# Altium PCB Amber_Main_Board.PcbDoc (part 2 of 2)
Units mm, origin at the board's own origin, x right, y up, seen from the top; angles counter-clockwise.
Board outline 90 x 23 mm, 4 copper layers (Top Layer, Power, Ground, Bottom Layer), stack 1.142 mm thick; 223 components, 97 nets, 585 pads, 378 vias.
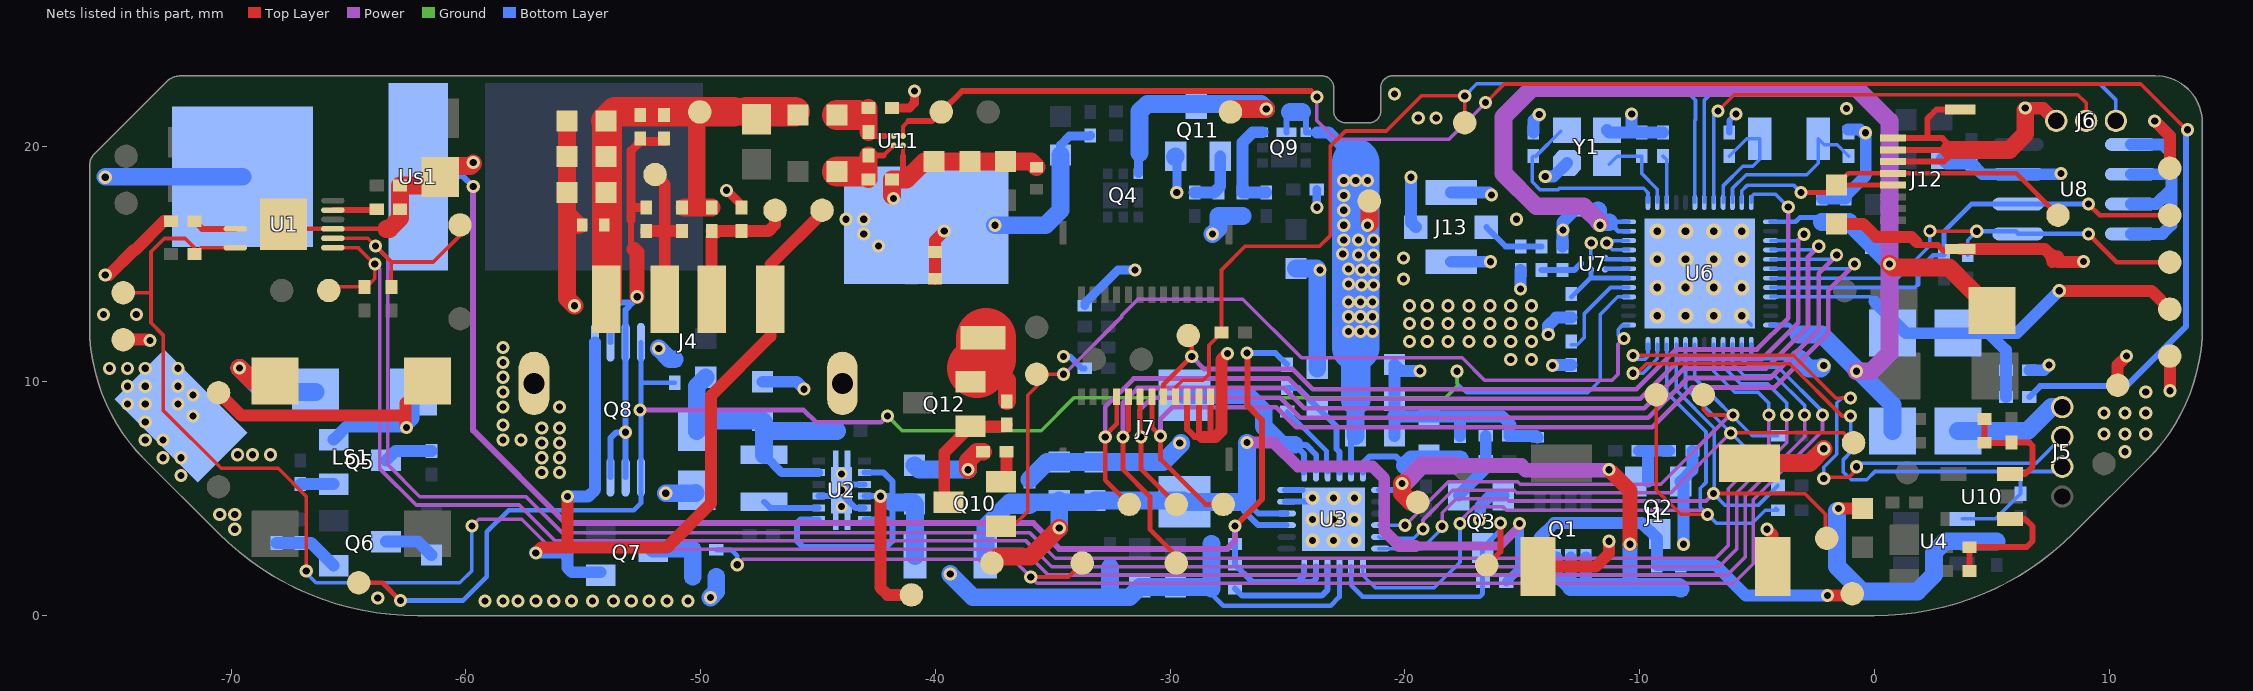
[diagram p4: the nets of this part, all layers, seen from the top]

## Via types
v1: diameter 0.559, hole 0.305, Top Layer to Bottom Layer, tented both sides, 350 vias
v2: diameter 0.66, hole 0.33, Top Layer to Bottom Layer, tented both sides, 16 vias
v3: diameter 0.6, hole 0.3, Top Layer to Bottom Layer, tented both sides, 9 vias
v4: diameter 0.5, hole 0.3, Top Layer to Bottom Layer, 3 vias

## Nets (pads, with @x,y where several pads share a name; then routed paths per layer and width w, separated by ;. In a path a pad name is that pad's centre, name@x,y a point inside that pad or via, vN(x,y) a via of type N, cw(c..) or ccw(c..) an arc to the next point about the centre after c; other vN are vias at no path point) (continued)
GND: C1.2 C2.2 C3.2 C4.2 C5.2 C6.2 C7.2 C8.2 C9.2 C10.2 C11.2 C13.2 C14.2 C15.2 C16.2 C19.2 C20.2 C21.2 C22.2 C23.2 C24.2 C29.1 C31.1 C32.1 C33.2 C34.1 C35.1 C36.1 C37.1 C38.1 C39.2 C40.2 C41.1 C42.1 C43.1 C44.2 C45.2 C46.2 C47.2 C48.1 C54.2 C55.2 C57.2 C58.2 C59.2 C60.2 C61.2 C62.2 C63.2 C65.2 C66.2 D2.1 D4.1 D12.2 D14.1 D17.2 J1.2 J1.3 J1.4 J4.5 J4.6 J5.4 J6.3 J7.10 J7.11 J7.12 J12.6 J12.7 J12.8 J12.9 J12.10 J13.2 J13.3 J13.4 J15.1 J16.2 L3.2 LS1.2 Q2.1 Q3.1 Q8.2 Q8.3 Q8.6 Q8.7 Q11.1 R4.1 R10.2 R11.2 R16.1 R22.1 R25.1 R26.2 R28.2 R39.2 R60.1 R64.1 R68.1 R69.1 R71.2 R73.2 RTH1.2 TP17.1 TP20.1 TP21.1 TP22.1 U1.3 U1.13 U2.3 U2.9 U2.11 U2.13 U2.14 U2.15 U2.16 U2.17 U3.9 U3.17 U3.18 U3.25 U4.2 U6.13 U6.33 U6.34 U6.49 U7.4 U8.1 U8.2 U8.3 U8.4 U8.7 U11.B1 Us1.3 Y1.2 Y1.4 | length 267.6
  Top Layer w0.178: -41.383,19.577 U11.B1@-41.383,20.038
  Top Layer w0.203: U1.13@-67.77,16.682 -67.57,16.482 U1.3@-65.67,16.482 -63.395,16.482
  Top Layer w0.254: -52.96,15.697 -52.96,16.862 ; -41.383,19.577 -41.383,18.74 -41.23,18.587 ; J7.10@-29.28,9.325 -29.28,7.944 -28.956,7.62 -28.639,7.62 ; -28.78,7.698 J7.11@-28.78,9.325 ; -28.28,7.661 J7.12@-28.28,9.325 ; J12.6@0.795,19.348 2.965,19.348 3.175,19.558 3.175,19.848 3.175,20.066 2.893,20.348 2.253,20.348 ; J12.7@0.795,19.848 3.139,19.848 ; J12.8@0.795,20.348 2.253,20.348 ; 1.802,15.911 1.929,15.784 2.706,15.784 2.925,15.565 3.602,15.565 J12.9@3.665,15.628 ; J12.10@3.665,21.568 2.645,21.568 2.253,21.176 2.253,20.348
  Top Layer w0.381: -52.96,16.862 -52.96,19.819 -52.578,20.201 C8.2@-51.562,20.201 ; -52.952,17.391 R10.2@-52.324,17.391 ; v1(-48.895,18.123) -48.26,17.488 R11.2@-48.26,17.391 R11.2@-48.252,17.399 ; C48.1@-41.845,21.635 -41.103,21.635 -40.894,21.844 v1(-40.894,22.352)
  Top Layer w0.508: v1@-75.195,14.523 -74.138,15.579 -74.095,15.579 -72.866,16.809 R4.1@-72.563,16.809 ; TP22.1@-74.603,11.761 v1@-73.492,11.761 ; U1.13@-67.77,16.682 U1.13@-67.618,16.834 ; C4.2@-40.013,14.351 C59.2@-40.013,15.494 -40.013,15.994 v1(-39.624,16.383) ; -28.639,7.62 -28.067,7.62 -27.813,7.874 -27.813,10.922 v1(-27.559,11.176) ; J1.4@-14.33,2.096 -11.874,2.096 -11.303,2.667 v1(-11.303,3.175) ; v1(-4.572,3.683) -4.33,3.441 J1.3@-4.33,2.096 ; C54.2@-1.608,16.695 -0.481,16.695 0.073,16.142 1.571,16.142 1.802,15.911 ; v1(-1.524,4.572) L3.2@-0.508,4.572 ; J12.9@3.665,15.628 7.255,15.628 7.82,15.063 v1@8.9,15.063 ; v1@6.423,21.603 7.167,21.603 J6.3@7.39,21.38 ; v1(6.423,21.635) 7.194,21.635 J6.3@7.747,21.082 ; 7.574,15.063 ccw(c6.98,15.063) 7.4,15.483 ccw(c7.82,15.903) 7.82,15.309 ; TP17.1@10.36,9.824 10.36,10.681 v1(10.741,11.062) ; v1(11.938,21.082) 12.584,20.436 TP20.1@12.584,19.063 ; v1(12.584,9.586) TP21.1@12.584,11.063
  Top Layer w0.635: -52.833,15.614 -52.705,15.486 v1(-52.705,13.589)
  Top Layer w0.762: v1(-69.65,10.554) -69.09,9.994 LS1.2@-68.136,9.994 ; -63.394,16.483 -63.258,16.483 -62.8,16.941 C1.2@-62.8,17.317 C3.2@-62.8,18.333 C66.2@-61.437,18.333 ; C66.2@-61.087,18.683 -60.618,19.152 -59.811,19.152 v1@-59.69,19.273 ; C9.2@-55.689,21.082 C7.2@-55.689,19.558 C6.2@-55.689,18.034 -55.689,17.118 ; v1(-55.372,13.208) -55.689,13.525 -55.689,17.118 ; D4.1@-55.208,16.637 -55.689,17.118 ; v1@-41.845,17.91 C55.2@-41.845,18.587 -41.23,18.587 -40.468,19.349 C58.2@-40.059,19.349 C5.2@-38.535,19.349 C2.2@-37.011,19.349 -35.925,19.349 D14.1@-35.687,19.111 ; v1(-38.608,6.223) -38.608,6.604 -38.227,6.985 R69.1@-37.965,6.985 ; J1.2@-5.33,6.503 -2.768,6.503 v1(-2.159,7.112) ; 3.175,19.848 5.751,19.848 6.423,20.52 v1@6.423,21.533
  Bottom Layer w0.152: U7.4@-12.076,15.249 -12.076,15.864 v1(-12.065,15.875) ; U6.33@-10.472,15.583 -11.152,15.583 -11.357,15.788 -11.357,15.983 U6.34@-10.472,15.983 ; v2(-5.647,12.783) U6.49@-5.247,12.383
  Bottom Layer w0.203: R22.1@-28.248,0.934 -27.74,0.426 -23.168,0.426 -22.791,0.803 U3.9@-22.791,2.109 ; C32.1@-6.212,20.579 C32.1@-6.212,20.777 ; U6.13@-5.247,11.558 -5.247,11.08 -5.134,10.967 C43.1@-3.237,10.967
  Bottom Layer w0.254: Q8.7@-53.846,5.901 -53.846,7.562 -53.592,7.816 v1(-53.196,7.816) ; Q8.2@-53.846,11.651 -53.846,13.023 -53.521,13.348 -52.886,13.348 -53.196,13.038 Q8.3@-53.196,11.651 v1(-53.196,7.816) ; Q8.6@-53.196,5.901 v1(-53.196,7.816) ; U2.3@-44.971,5.097 U2.13@-44.246,5.097 ; v4(-43.996,5.347) -43.996,5.18 -43.413,4.597 U2.11@-43.021,4.597 ; U2.13@-43.746,5.597 U2.9@-43.021,5.597 ; v1(-34.544,11.049) -34.275,11.049 -33.767,10.541 R71.2@-33.639,10.541 ; U3.17@-25.114,4.859 U3.25@-23.864,4.859 ; U3.18@-25.114,5.359 U3.25@-24.364,5.359 ; R25.1@-15.556,7.665 R25.1@-15.556,7.8 ; R16.1@-7.755,7.03 R16.1@-7.712,7.03 ; C32.1@-6.18,20.579 -6.18,21.097 v1(-5.896,21.381)
  Bottom Layer w0.381: C61.2@-34.671,19.621 -34.671,20.048 -34.29,20.429 -33.427,20.429 C60.2@-33.401,20.455 ; R73.2@-33.639,13.208 -33.639,13.315 -32.222,14.732 v1(-31.496,14.732) ; Q11.1@-29.794,19.549 -29.718,19.472 v1(-29.718,18.034) ; v1@-23.757,17.407 C63.2@-23.757,18.161
  Bottom Layer w0.508: v1(-75.365,18.682) v1@-75.347,18.7 ; C10.2@-47.371,9.97 -45.91,9.97 v1(-45.593,9.652) ; -20.511,8.49 -20.447,8.49 ; C20.2@-20.447,7.654 -20.447,8.49 ; v1(-19.739,18.682) -19.739,16.76 J13.3@-19.534,16.555 ; v1(-19.358,10.427) -20.172,10.427 C47.2@-20.447,10.702 C46.2@-20.447,9.178 -20.447,8.49 ; J13.4@-18.034,15.08 v1(-16.356,15.08) ; J13.2@-18.034,18.03 -16.42,18.03 v1(-16.31,17.92) ; C19.2@-17.653,7.657 -17.653,8.49 ; v1(-16.818,4.077) -16.793,4.102 -16.793,4.67 -16.338,5.125 Q3.1@-15.802,5.125 ; R25.1@-15.556,7.665 -14.417,7.665 D2.1@-14.351,7.599 ; R25.1@-15.556,7.8 -15.556,8.066 -15.494,8.128 -15.856,8.49 -17.653,8.49 ; v1(-15.07,13.918) C40.2@-15.07,14.735 ; C29.1@-14.532,20.579 -14.532,21.095 v1(-14.278,21.349) ; v1(-14.024,18.714) -13.666,18.714 Y1.2@-13.096,19.284 ; v1(-13.897,11.983) -13.897,12.364 -13.558,12.703 C41.1@-12.911,12.703 ; v1@-13.708,10.676 C42.1@-12.911,10.676 ; C39.2@-13.292,15.735 -13.292,16.751 C38.1@-12.776,17.267 ; Y1.4@-11.396,20.684 -11.291,20.579 -10.341,20.579 ; v1(-10.341,21.381) -10.341,20.579 ; C35.1@-9.006,20.579 C31.1@-9.913,20.579 -10.341,20.579 ; Q2.1@-8.255,5.715 -7.755,6.215 R16.1@-7.755,7.03 ; v1(-8.128,3.048) Q2.1@-8.128,5.588 ; C36.1@-2.243,17.767 C37.1@-1.227,17.767 -1.227,17.89 -0.37,18.747 -0.37,20.46 -0.616,20.706 C34.1@-1.132,20.706 ; C44.2@2.87,19.476 3.079,19.266 C45.2@4.137,19.266 4.594,18.809 U8.7@6.12,18.809 v1@7.947,18.809 ; C33.2@6.596,10.459 7.217,10.459 v1(7.439,10.681) ; U8.4@10.92,16.269 12.265,16.269 12.646,16.65 12.646,18.174 ; U8.3@10.92,17.539 12.011,17.539 12.646,18.174 ; U8.2@10.92,18.809 12.392,18.809 12.646,19.063 ; U8.1@10.92,20.079 12.265,20.079 12.598,19.745 ; v1(11.938,21.082) 12.598,20.422 12.598,19.745 ; -20.447,8.49 C14.2@-18.977,8.49 -17.653,8.49 ; 12.598,19.745 12.598,19.11 12.646,19.063 ; 12.646,18.174 12.646,19.063
  Bottom Layer w0.762: v1@-75.347,18.7 Us1.3@-69.515,18.7 ; v1(-69.65,10.554) -68.634,9.538 D12.2@-66.401,9.538 ; v1(-51.787,11.392) -51.322,10.927 R39.2@-51.108,10.927 ; v1(-51.489,5.22) -50.233,5.22 C65.2@-50.219,5.234 ; v1(-49.584,0.775) -49.338,1.021 R64.1@-49.338,1.664 ; C11.2@-40.894,6.413 -40.703,6.223 v1(-38.608,6.223) ; v1(-39.37,1.778) -39.37,1.764 -38.394,0.787 -32.766,0.787 ; v1(-37.465,16.637) -35.306,16.637 -34.671,17.272 C61.2@-34.671,19.621 ; C16.2@-35.995,5.801 -35.243,6.553 C13.2@-34.725,6.553 C15.2@-33.201,6.553 -30.297,6.553 -29.543,7.307 v1@-29.543,7.366 ; C24.2@-32.566,2.053 -32.566,0.987 -32.766,0.787 ; Q11.1@-29.794,19.549 Q11.1@-29.772,19.571 ; R22.1@-28.304,1.219 C23.2@-29.772,1.219 C22.2@-31.296,1.219 -31.728,0.787 -32.766,0.787 ; R22.1@-28.24,1.156 RTH1.2@-28.24,3.061 ; v1(-28.194,16.256) -27.94,16.51 R60.1@-27.94,17.026 R68.1@-26.924,17.026 ; C62.2@-24.638,14.795 -23.762,14.795 -23.736,14.769 C21.2@-23.736,10.538 ; C43.1@-3.237,10.967 C43.1@-3.221,10.967 ; C43.1@-3.229,10.975 C43.1@-3.221,10.967 ; v1@-2.222,10.604 -2.286,10.541 -2.795,10.541 C43.1@-3.221,10.967 ; v1@-1.594,4.47 -1.594,2.102 -0.528,1.036 1.827,1.036 2.54,1.749 2.54,2.701 3.014,3.175 U4.2@3.74,3.175 3.748,3.167 R28.2@5.207,3.167 ; D17.2@3.556,7.866 6.522,7.866 7.546,8.89 J5.4@8.001,8.89
  other v1: -59.182,0.635 -58.42,0.635 -57.785,0.635 -57.023,0.635 -56.261,0.635 -55.499,0.635 -54.61,0.635 -53.721,0.635 -52.959,0.635 -52.197,0.635 -51.435,0.635 -50.546,0.635 -63.754,0.762 -69.85,3.683 -70.485,4.318 -69.85,4.318 -72.136,5.969 -56.769,6.096 -56.007,6.096 -72.898,6.731 -72.136,6.731 -56.769,6.731 -56.007,6.731 -69.723,6.858 -69.088,6.858 -68.326,6.858 10.668,6.985 -56.769,7.366 -56.007,7.366 -29.591,7.366 -73.66,7.493 -72.898,7.493 -58.42,7.493 -57.658,7.493 9.779,7.747 10.668,7.747 11.557,7.747 -56.769,8.001 -56.007,8.001 -58.42,8.128 -73.66,8.255 -71.628,8.509 9.779,8.636 10.668,8.636 11.557,8.636 -58.42,8.89 -56.007,8.89 -74.422,9.017 -73.66,9.017 -72.263,9.017 -71.628,9.398 -58.42,9.525 11.557,9.525 -74.422,9.779 -73.66,9.779 -72.263,9.779 -58.42,10.16 -75.184,10.541 -74.422,10.541 -73.66,10.541 -72.263,10.541 -13.716,10.668 -2.159,10.668 -58.42,10.795 -15.494,10.922 -14.605,10.922 -58.42,11.43 -19.812,11.684 -19.05,11.684 -18.161,11.684 -17.272,11.684 -16.383,11.684 -15.494,11.684 -14.605,11.684 -73.46,11.729 -19.812,12.446 -19.05,12.446 -18.161,12.446 -17.272,12.446 -16.383,12.446 -15.494,12.446 -14.605,12.446 -75.438,12.827 -74.041,12.827 -19.812,13.208 -19.05,13.208 -18.161,13.208 -17.272,13.208 -16.383,13.208 -15.494,13.208 -14.605,13.208 -20.066,14.351 -75.365,14.523 -23.622,14.732 8.9,15.095 -20.066,15.24 -42.418,15.748 -11.405,15.875 -43.053,16.256 -13.262,16.428 -43.815,16.891 -43.053,16.891 -15.24,16.891 -23.749,17.399 -41.783,17.78 7.947,18.841 -59.69,19.304 -0.381,20.574 -19.431,21.209 -18.669,21.209 -1.197,21.603 -20.447,22.225
  other v2: -9.247,12.783 -8.047,12.783 -6.847,12.783 -9.247,13.983 -8.047,13.983 -6.847,13.983 -5.647,13.983 -9.247,15.183 -8.047,15.183 -6.847,15.183 -5.647,15.183 -9.247,16.383 -8.047,16.383 -6.847,16.383 -5.647,16.383
  other v3: -23.941,3.209 -23.041,3.209 -22.141,3.209 -23.941,4.109 -23.041,4.109 -22.141,4.109 -23.941,5.009 -23.041,5.009 -22.141,5.009
  other v4: -43.996,4.647 -43.996,6.047
GPOUT: R3.1 TP5.1 U1.12 U6.15 | length 100.5
  Top Layer w0.152: TP5.1@-74.603,13.761 -73.461,13.761 ; U1.12@-69.82,15.682 -71.293,15.682 R3.1@-71.563,15.412 -71.563,15.674 -71.961,16.072 -72.848,16.072 -73.416,15.504 -73.416,12.475 -72.901,11.96 -72.901,8.76 -70.421,6.279 -68.001,6.279 -66.802,5.08 v1(-66.802,1.905)
  Power w0.152: v1(-59.744,3.823) -59.458,4.109 -57.617,4.109 -56.34,2.832 -36.29,2.832 -35.193,1.736 -6.265,1.736 -5.512,2.489 -5.512,5.091 -2.975,7.628 v1(-2.975,8.554)
  Bottom Layer w0.152: v1(-66.802,1.905) -66.802,1.821 -66.384,1.404 -60.258,1.404 -59.744,1.918 v1(-59.744,3.823) ; U6.15@-6.047,11.558 -6.047,10.732 -5.546,10.23 -4.245,10.23 -2.975,8.96 v1(-2.975,8.554)
HALL_OUT: C54.1 J12.4 J12.5 TP70.1 U6.47 | length 17.7
  Top Layer w0.203: v1(-3.132,18.029) -1.926,18.029 C54.1@-1.608,18.346 C54.1@-1.606,18.348 ; J12.4@0.795,18.348 C54.1@-1.606,18.348 ; TP70.1@7.82,17.063 6.035,18.848 J12.5@0.795,18.848 -1.106,18.848 C54.1@-1.606,18.348
  Bottom Layer w0.152: U6.47@-5.647,17.608 -5.647,18.104 -5.405,18.346 -3.449,18.346 v1(-3.132,18.029)
I2C_A_SCL_T_E: R46.1 TP49.1 U6.8 U8.6 | length 19.6
  Top Layer w0.203: v1(9.112,17.539) 9.588,17.063 TP49.1@12.584,17.063
  Bottom Layer w0.152: U6.8@-4.422,13.983 1.724,13.983 1.851,14.11
  Bottom Layer w0.203: 1.851,14.11 1.851,14.714 2.499,15.362 R46.1@2.964,15.362 2.964,16.378 4.125,17.539 U8.6@6.12,17.539 v1(9.112,17.539)
I2C_A_SDA_T_E: R47.1 TP50.1 U6.7 U8.5 | length 20.1
  Top Layer w0.152: v1@2.202,16.378 v1(4.361,16.378)
  Top Layer w0.203: v1(9.112,16.269) 10.318,15.063 TP50.1@12.584,15.063
  Bottom Layer w0.152: U6.7@-4.422,14.383 0.981,14.383 2.359,15.761 v1(2.359,16.396) ; R47.1@3.98,15.362 3.98,15.997 v1@4.234,16.251
  Bottom Layer w0.203: v1@4.234,16.251 v1(4.361,16.378) 6.011,16.378 U8.5@6.12,16.269 v1(9.112,16.269)
I_2.06V: J4.2 R8.2 R10.1 TP18.1 | length 7.1
  Top Layer w0.508: R10.1@-52.324,16.391 -51.53,16.391 ; TP18.1@-51.943,18.796 -51.53,18.383 -51.53,16.391 ; J4.2@-51.562,13.509 J4.2@-51.53,13.477 -51.53,16.391 ; R8.2@-50.8,16.391 -51.53,16.391
I_2.76V: J4.3 R9.2 R11.1 TP19.1 | length 6.4
  Top Layer w0.508: J4.3@-49.53,13.477 -49.53,16.137 -49.276,16.391 ; R9.2@-49.53,16.391 -49.276,16.391 ; TP19.1@-46.831,17.272 -46.831,16.669 -47.109,16.391 -48.387,16.391 -49.276,16.391
IIC_A_M_BAT_SCL: R18.2 TP29.1 U3.5 U6.20 | length 31.2
  Top Layer w0.152: v1(-6.122,7.792) -1.315,7.792 TP29.1@-0.889,7.366 TP29.1@-1.016,7.239
  Power w0.152: v1(-19.231,3.696) -19.231,4.072 -18.276,5.027 ; -19.231,4.077 -17.961,5.347 -15.342,5.347 -15.24,5.245 -8.668,5.245 v1(-6.122,7.792)
  Bottom Layer w0.152: U3.5@-21.114,3.359 -21.051,3.296 -19.631,3.296 v1(-19.231,3.696) ; U6.20@-8.047,11.558 -8.047,9.717 v1(-6.122,7.792) -4.936,6.606 R18.2@-4.11,6.606
IIC_A_M_BAT_SDA: R19.2 TP27.1 U3.6 U6.21 | length 32.2
  Top Layer w0.152: v1(-6.858,5.207) -2.975,5.207 -2.086,4.318 -2.086,3.356 TP27.1@-2.032,3.302
  Power w0.152: v1(-18.415,3.81) -18.415,4.385 -17.809,4.991 -15.677,4.991 -15.576,4.89 -7.175,4.89 v1(-6.858,5.207)
  Bottom Layer w0.152: U3.6@-21.114,2.859 U3.6@-21.041,2.859 -19.278,2.859 -18.415,3.722 v1(-18.415,3.81) ; U6.21@-8.447,11.558 -8.447,9.614 -6.82,7.987 -6.82,5.245 v1(-6.858,5.207) -6.35,4.699 -4.959,4.699 R19.2@-4.11,5.548
IIC_A_SCL_BAT: R2.1 TP8.1 U1.2 U6.17 | length 87.2
  Top Layer w0.152: U1.2@-65.67,16.082 -64.186,16.082 v1(-63.853,15.748) -63.173,15.068 ; R2.1@-63.173,14.007 -63.173,15.068 ; TP8.1@-60.252,16.65 -60.252,16.202 -61.386,15.068 -63.173,15.068
  Power w0.152: v1(-63.853,15.748) -63.322,15.217 -63.322,6.426 -61.97,5.074 -57.439,5.074 -55.909,3.543 -35.995,3.543 -34.899,2.447 -6.768,2.447 -6.223,2.992 -6.223,5.411 -4.499,7.135 v1(-4.499,8.554)
  Bottom Layer w0.152: U6.17@-6.847,11.558 -6.847,10.412 -5.954,9.519 -4.956,9.519 -4.499,9.062 v1(-4.499,8.554)
IIC_A_SDA_BAT: R1.1 TP4.1 U1.1 U6.16 | length 85.6
  Top Layer w0.152: TP4.1@-65.84,13.856 -65.689,14.007 R1.1@-64.316,14.007 -64.225,14.007 -63.881,14.351 -63.881,14.958 v1@-63.909,14.986 ; U1.1@-65.67,15.682 -64.577,15.682 ; U1.1@-65.278,15.672 -64.596,15.672 v1@-63.909,14.986 ; v1(-63.881,14.986) v1@-63.909,14.986
  Power w0.152: v1(-63.881,14.986) -63.678,14.783 -63.678,6.274 -62.122,4.718 -57.724,4.718 -56.193,3.188 -36.142,3.188 -35.046,2.091 -6.621,2.091 -5.867,2.845 -5.867,5.238 -3.737,7.369 v1(-3.737,8.554)
  Bottom Layer w0.152: U6.16@-6.447,11.558 -6.447,10.629 -5.693,9.875 -4.55,9.875 -3.737,9.062 v1(-3.737,8.554)
INT_CHG: R21.2 TP30.1 U3.7 U6.22 | length 36.2
  Top Layer w0.152: TP30.1@-9.293,9.411 -9.293,5.356 -8.255,4.318 v1(-7.112,4.318)
  Power w0.152: v1(-17.653,3.937) -17.653,4.032 -17.05,4.636 -15.825,4.636 -15.685,4.496 -7.29,4.496 v1(-7.112,4.318)
  Bottom Layer w0.152: U3.7@-21.791,2.109 -21.791,1.725 -21.254,1.188 -18.751,1.188 -17.653,2.286 v1(-17.653,3.937) ; U6.22@-8.847,11.558 -8.847,9.511 -7.176,7.84 -7.176,5.68 -7.417,5.438 -7.417,4.623 v1(-7.112,4.318) -6.731,3.937 -5.207,3.937 -4.654,4.49 R21.2@-4.11,4.49 R21.2@-4.192,4.572
MB_ADC: C33.1 D11.2 D17.1 R61.2 TP55.1 U6.9 | length 21.7
  Top Layer w0.508: v1(7.874,13.843) 11.804,13.843 TP55.1@12.584,13.063
  Bottom Layer w0.152: U6.9@-4.422,13.583 -0.203,13.583 0,13.38
  Bottom Layer w0.508: 0,13.38 1.344,12.036 D17.1@3.556,12.036 4.876,12.036 ; R61.2@5.596,9.316 C33.1@5.596,10.459 5.596,11.316 4.876,12.036 ; v1(7.874,13.843) 6.067,12.036 4.876,12.036
MB_LOAD: C6.1 C7.1 C8.1 C9.1 C57.1 D4.2 J4.1 R8.1 R9.1 R48.2 R49.1 TP14.1 | length 20.3
  Top Layer w0.762: R8.1@-50.692,17.391 -50.165,17.391 ; TP14.1@-50.165,21.336 -50.165,17.391 ; R9.1@-49.53,17.391 -50.165,17.391
  Top Layer w1.27: C9.1@-54.038,21.082 -53.654,21.466 -48.583,21.466 ; J4.1@-53.989,13.518 -53.989,18.034 -53.989,19.558 C9.1@-53.989,21.032 ; R48.2@-48.075,21.466 R49.1@-45.977,21.466
MCU_2.8V: C36.2 C37.2 C38.2 C43.2 D11.1 D15.1 R40.2 U6.1 U6.12 U6.35 U6.36 | length 58.2
  Top Layer w0.762: v1(0.635,14.986) 0.787,14.834 3.171,14.834 D15.1@5.006,12.999
  Power w0.508: -14.704,22.352 -0.644,22.352
  Power w0.762: -14.704,22.352 -15.802,21.254 -15.802,18.841 -14.405,17.444 -12.389,17.444 v1@-11.684,16.739 ; v1(-0.762,10.414) -0.127,10.414 0.635,11.176 v1(0.635,14.986) 0.635,21.073 -0.644,22.352
  Bottom Layer w0.203: -11.303,16.764 -11.284,16.783 -11.049,16.783 ; U6.35@-10.472,16.383 -10.922,16.383 -11.049,16.51 -11.049,16.783 ; U6.36@-10.472,16.783 -11.049,16.783 ; U6.12@-4.422,12.383 -3.637,12.383 C43.2@-3.229,11.975 ; U6.1@-4.422,16.783 -3.362,16.783 -3.184,16.961 -2.438,16.961 C36.2@-2.243,16.767
  Bottom Layer w0.762: C38.2@-11.776,17.267 -11.776,16.831 -11.684,16.739 -11.659,16.764 -11.303,16.764 ; C43.2@-3.229,11.975 -2.228,11.975 0.762,8.985 D11.1@0.762,7.866 ; C36.2@-2.243,16.767 C37.2@-1.227,16.767 -1.089,16.767 R40.2@-0.192,15.87 ; R40.2@0.043,15.87 R40.2@-0.192,15.87 ; v1@0.635,15.043 R40.2@-0.192,15.87
  other v1: -11.684,16.637
NetC1_1: C1.1 U1.5 | length 1.8
  Top Layer w0.254: U1.5@-65.67,17.282 C1.1@-63.835,17.282
NetC10_1: C10.1 C65.1 L1.2 L2.1 R6.2 U2.5 | length 12.7
  Bottom Layer w0.381: L1.2@-47.298,6.855 -46.54,6.097 U2.5@-44.971,6.097
  Bottom Layer w0.762: L2.1@-49.784,10.16 -50.165,9.779 C65.1@-50.165,7.86 -49.706,8.319 C10.1@-47.371,8.319 -47.298,8.246 C10.1@-47.298,7.874 ; L1.2@-47.298,6.855 C10.1@-47.298,7.874 ; R6.2@-44.188,7.874 C10.1@-47.298,7.874
NetC14_1: C14.1 C18.2 C19.1 Q1.1 Q1.2 Q1.3 R12.2 TP24.1 U3.1 U3.24 | length 32.3
  Top Layer w0.635: v1@-11.222,6.142 -10.414,5.334 v1(-10.414,3.048)
  Top Layer w0.762: v1(-20.12,5.633) -20.12,5.22 -19.739,4.839 TP24.1@-19.453,4.839
  Power w0.635: -17.907,6.395 -15.043,6.395 -14.845,6.198 v1@-11.303,6.198
  Power w0.762: v1@-20.044,5.633 -19.282,6.395 -17.907,6.395
  Bottom Layer w0.254: U3.24@-21.791,6.109 -21.791,6.502 -21.517,6.776 -20.374,6.776 -19.993,6.395 -19.993,5.76 v1(-20.12,5.633) -20.394,5.359 U3.1@-21.114,5.359
  Bottom Layer w0.508: Q1.3@-13.545,2.491 -13.545,1.693 -13.003,1.151 ; -12.937,1.217 Q1.2@-12.937,2.491 ; -12.287,1.217 Q1.1@-12.287,2.491 ; C18.2@-9.271,1.151 R12.2@-8.255,1.151
  Bottom Layer w0.635: -10.414,1.217 v1(-10.414,3.048)
  Bottom Layer w0.762: -19.993,6.395 -19.731,6.657 C19.1@-17.653,6.657 ; -12.937,1.217 -12.287,1.217 -10.414,1.217 -8.321,1.217 R12.2@-8.255,1.151
  other v1: -11.303,6.223
NetC17_1: C17.1 L4.1 U3.19 U3.20 | length 9
  Bottom Layer w0.254: U3.19@-24.291,6.109 -24.291,6.883 -24.692,7.284 -24.211,7.284 -23.778,6.85 U3.20@-23.778,6.195
  Bottom Layer w0.762: L4.1@-29.391,9.4 -26.716,9.4 C17.1@-26.013,8.697 -26.013,8.065 -25.232,7.284 -24.692,7.284
NetC17_2: C17.2 U3.21 | length 3.3
  Bottom Layer w0.203: C17.2@-25.013,8.697 -23.346,7.029 -23.346,6.164 U3.21@-23.291,6.109
NetC18_1: C18.1 Q1.4 Q2.3 R12.1 TP23.1 | length 16.4
  Top Layer w0.508: v1(-2.003,0.858) -1.019,0.858 TP23.1@-0.943,0.934
  Bottom Layer w0.508: Q1.4@-14.279,2.491 -14.279,3.314 -13.643,3.95 -9.906,3.95 -9.271,3.315 C18.1@-9.271,2.151 R12.1@-8.255,2.151 -6.764,2.151 -5.471,0.858 v1(-2.003,0.858)
NetC29_2: C29.2 U6.37 Y1.3 | length 8.2
  Bottom Layer w0.152: C29.2@-14.532,19.579 -14.583,19.528 -14.583,18.482 -14.256,18.155 -13.471,18.155 -13.42,18.206 -9.833,18.206 -9.647,18.02 U6.37@-9.647,17.608 ; C29.2@-14.435,19.561 Y1.3@-13.362,20.634
NetC31_2: C31.2 U6.38 Y1.1 | length 3.8
  Bottom Layer w0.152: Y1.1@-11.299,19.234 -10.954,19.579 C31.2@-9.913,19.579 -9.913,18.841 -9.247,18.175 U6.38@-9.247,17.608
NetC32_2: C32.2 U6.45 Y2.2 | length 5.2
  Bottom Layer w0.152: U6.45@-6.447,17.608 -6.447,18.31 -5.61,19.146 -5.184,19.146 -4.89,19.441 Y2.2@-4.89,20.315 -5.444,20.315 C32.2@-6.18,19.579
NetC34_2: C34.2 U6.46 Y2.1 | length 7.3
  Bottom Layer w0.152: U6.46@-6.047,17.608 -6.047,18.207 -5.463,18.791 -2.878,18.791 -2.39,19.279 Y2.1@-2.39,20.315 -2.136,20.061 -1.582,20.061 C34.2@-1.1,19.579
NetC35_2: C35.2 U6.39 | length 2
  Bottom Layer w0.152: C35.2@-9.006,19.579 -8.847,19.42 U6.39@-8.847,17.608
NetC39_1: C39.1 R41.2 U7.5 | length 1.8
  Bottom Layer w0.254: R41.2@-14.181,14.735 C39.1@-13.292,14.735 -12.773,14.735 U7.5@-12.509,14.999
NetC40_1: C40.1 J13.1 R41.1 | length 2.7
  Bottom Layer w0.254: J13.1@-16.534,16.555 -15.714,15.735 C40.1@-15.07,15.735 R41.1@-14.181,15.735
NetC41_2: C41.2 U6.30 U7.3 | length 3.1
  Bottom Layer w0.203: C41.2@-12.911,13.576 -12.104,14.383 U6.30@-10.472,14.383 ; -12.076,14.411 U7.3@-12.076,14.749
NetC42_2: C42.2 U6.29 | length 4
  Bottom Layer w0.152: C42.2@-12.911,11.544 -12.665,11.544 -12.37,11.839 -12.37,12.855 -11.242,13.983 U6.29@-10.472,13.983
NetC48_2: C48.2 C49.1 R49.2 U11.A2 | length 3.1
  Top Layer w0.178: -42.164,20.447 -42.155,20.438 U11.A2@-41.783,20.438
  Top Layer w0.254: C49.1@-42.853,20.611 -42.68,20.438 -42.155,20.438
  Top Layer w0.762: C49.1@-42.853,20.611 C48.2@-42.853,21.627
  Top Layer w1.27: R49.2@-44.196,21.336 -43.274,21.336
NetC49_2: C49.2 C55.1 R50.2 U11.A1 | length 3.3
  Top Layer w0.178: -42.21,19.611 U11.A1@-41.825,19.996
  Top Layer w0.254: C49.2@-42.853,19.611 -42.21,19.611
  Top Layer w0.762: C55.1@-42.853,18.595 C49.2@-42.853,19.611
  Top Layer w1.27: R50.2@-44.196,18.923 -43.11,18.923
NetC51_2: C51.2 R54.2 U10.1 | length 5.5
  Top Layer w0.254: R54.2@4.056,1.905 C51.2@4.056,2.921 6.477,2.921 6.731,3.175 6.731,3.81 6.411,4.13 U10.1@5.772,4.13
NetC52_1: C52.1 R13.1 R55.1 U10.3 | length 5.1
  Top Layer w0.254: C52.1@4.691,8.382 R13.1@4.691,7.366 5.834,7.366 R55.1@5.842,7.374 6.596,7.374 6.731,7.239 6.731,6.35 6.411,6.03 U10.3@5.772,6.03
NetC56_1: C56.1 Q4.3 Q11.3 R56.1 TP41.1 | length 9.6
  Top Layer w0.762: TP41.1@-27.305,21.59 v1(-25.908,21.59)
  Bottom Layer w0.381: Q4.3@-31.354,18.83 -31.354,19.67
  Bottom Layer w0.762: -31.304,19.72 C56.1@-31.304,20.46 R56.1@-31.304,21.476 -30.974,21.806 Q11.3@-28.883,21.806 -26.124,21.806 v1(-25.908,21.59)
NetD12_1: D12.1 LS1.1 Q5.1 TP46.1 | length 15.7
  Top Layer w0.508: TP46.1@-70.539,9.5 -69.561,8.522 -62.569,8.522 ; v1(-62.538,8.014) -62.569,8.045 -62.569,8.522 ; LS1.1@-61.636,9.994 -62.569,9.061 -62.569,8.522
  Bottom Layer w0.508: Q5.1@-65.633,7.506 -65.072,8.067 -62.559,8.067 -62.231,8.395 D12.1@-62.231,9.538
NetF2_1: F2.1 Q12.2 R74.1 | length 3.6
  Top Layer w0.762: -37.846,10.922 -36.957,10.033 R74.1@-36.957,9.136
  Top Layer w2.54: -38.227,10.541 -37.846,10.922 F2.1@-37.846,11.835
NetJ7_4: J7.4 TP6.1 U6.3 | length 43.5
  Top Layer w0.203: J7.4@-32.28,9.525 J7.4@-32.28,9.325 -32.28,8.17 -32.766,7.684 v1(-32.766,7.62) -32.766,5.77 TP6.1@-31.74,4.744
  Power w0.203: v1(-32.766,7.62) -32.766,8.897 -31.559,10.103 -24.946,10.103 -24.089,9.246 -9.972,9.246 -9.296,9.921 -9.296,9.924 -8.279,10.941 -4.778,10.941 -3.241,12.479 -3.241,16.015
  Bottom Layer w0.152: U6.3@-4.422,15.983 -3.273,15.983 v1(-3.005,16.251)
NetJ7_5: J7.5 TP7.1 U6.4 | length 46.7
  Top Layer w0.203: J7.5@-31.78,9.525 J7.5@-31.78,9.325 -31.78,7.908 -32.004,7.684 v1(-32.004,7.62) -32.004,6.223 -30.861,5.08 -30.861,3.683 -29.74,2.562 TP7.1@-29.74,2.244
  Power w0.203: v1(-32.004,7.62) -32.004,9.084 -31.391,9.697 -25.143,9.697 -24.285,8.839 -9.804,8.839 -8.89,9.753 -8.89,9.756 -8.111,10.535 -4.61,10.535 -2.835,12.31 -2.835,15.278 v1(-2.37,15.743)
  Bottom Layer w0.152: U6.4@-4.422,15.583 -2.53,15.583 v1(-2.37,15.743)
NetJ7_6: J7.6 TP9.1 U6.5 | length 43.9
  Top Layer w0.203: v1@-31.28,7.658 J7.6@-31.28,9.325 J7.6@-31.28,9.525 ; v1(-31.242,7.62) -31.242,6.246 TP9.1@-29.74,4.744
  Power w0.203: v1@-31.296,7.633 -31.296,8.776 -30.781,9.29 -25.311,9.29 -24.454,8.433 -9.636,8.433 -8.484,9.585 -8.484,9.588 -7.943,10.129 -4.442,10.129 -2.377,12.194 -2.377,14.593 v1(-1.608,15.362)
  Bottom Layer w0.152: U6.5@-4.422,15.183 -1.787,15.183 v1(-1.608,15.362)
NetJ7_7: J7.7 TP10.1 U6.6 | length 44.9
  Top Layer w0.203: J7.7@-30.78,9.525 J7.7@-30.78,9.325 -30.78,8.038 v1(-30.407,7.665) -30.407,6.658 -28.493,4.744 TP10.1@-27.74,4.744
  Power w0.203: v1(-30.407,7.665) -30.407,8.395 -29.918,8.884 -25.479,8.884 -24.622,8.026 -9.467,8.026 -8.077,9.416 -8.077,9.419 -7.774,9.722 -4.273,9.722 -1.97,12.025 -1.97,13.857 v1(-0.846,14.981)
  Bottom Layer w0.152: U6.6@-4.422,14.783 -1.044,14.783 v1(-0.846,14.981)
NetJ7_8: J7.8 TP11.1 U6.48 | length 37.4
  Top Layer w0.203: J7.8@-30.28,9.325 -30.28,9.852 v1(-29.083,11.049) TP11.1@-29.083,12.192
  Power w0.203: v1(-29.083,11.049) -28.544,10.51 -24.778,10.51 -23.92,9.652 -10.141,9.652 -9.703,10.09 -9.703,10.093 -8.448,11.348 -5.007,11.348 -3.672,12.683 v1(-3.672,17.412)
  Bottom Layer w0.152: U6.48@-5.247,17.608 -5.247,17.843 -5.138,17.953 -4.213,17.953 v1(-3.672,17.412)
NetL1_1: L1.1 U2.2 | length 2.4
  Bottom Layer w0.254: L1.1@-47.298,4.855 -47.04,4.597 U2.2@-44.971,4.597
NetQ2_2: Q2.2 R15.1 R16.2 | length 2.6
  Bottom Layer w0.508: R15.1@-10.041,7.03 -9.652,7.03 ; -9.652,5.715 -9.652,7.03 ; R16.2@-8.755,7.03 -9.652,7.03
NetQ3_2: Q3.2 R14.1 R25.2 | length 3
  Bottom Layer w0.508: Q3.2@-17.707,5.125 -16.556,6.276 R25.2@-16.556,7.665
NetQ5_2: Q5.2 R44.1 | length 1.4
  Bottom Layer w0.508: R44.1@-67.056,5.609 Q5.2@-65.641,5.609
NetQ5_3: Q5.3 R42.2 | length 2.1
  Bottom Layer w0.508: Q5.3@-63.398,6.617 -62.993,7.022 R42.2@-61.468,7.022
NetQ6_1: Q6.1 R45.2 R65.1 | length 2.8
  Bottom Layer w0.508: R65.1@-68.072,3.101 -66.594,3.101 Q6.1@-65.634,2.14
NetQ6_3: Q6.3 R36.2 | length 2.2
  Bottom Layer w0.508: Q6.3@-63.398,3.156 -62.039,3.156 R36.2@-61.468,2.585
NetQ7_3: Q7.3 R62.2 R64.2 | length 2.8
  Bottom Layer w0.762: Q7.3@-52.022,2.87 R62.2@-50.402,2.87 ; R64.2@-50.338,1.664 R62.2@-50.338,2.807
NetQ9_3: Q9.3 R57.1 R68.2 | length 4.2
  Bottom Layer w0.508: Q9.3@-26.069,20.596 -26.485,20.596 -26.924,20.158 R68.2@-26.924,18.026 R57.1@-25.908,18.026
NetQ10_1: Q10.1 R69.2 | length 1.4
  Top Layer w0.508: Q10.1@-37.211,5.715 -36.965,5.961 R69.2@-36.965,6.985
NetQ10_2: Q10.2 TP74.1 U6.25 | length 38.3
  Top Layer w0.152: Q10.2@-37.211,3.81 -36.703,3.81 -36.068,4.445 -36.068,9.398 -35.179,10.287 ; TP74.1@-35.687,10.287 -35.687,10.033 -35.433,10.287 -35.179,10.287 ; v1(-34.544,10.287) -35.179,10.287
  Power w0.152: v1(-34.544,10.287) -34.516,10.287 -32.055,12.748 -32.055,12.804 -31.372,13.487 -26.904,13.487 -24.403,10.986 -17.561,10.986 -16.609,10.033 -11.176,10.033 -10.922,10.287 -10.922,11.557 v1(-10.668,11.811)
  Bottom Layer w0.152: v1(-10.668,11.811) -10.79,11.811 -10.919,11.941 -10.919,12.192 -10.729,12.383 U6.25@-10.472,12.383
NetQ10_3: Q10.3 Q12.1 R74.2 | length 5.4
  Top Layer w0.508: Q10.3@-39.446,4.826 -39.624,5.004 -39.624,6.947 Q12.1@-38.506,8.064 -37.028,8.064 R74.2@-36.957,8.136
NetQ11_2: Q11.2 R34.1 R60.2 | length 2.5
  Bottom Layer w0.508: R34.1@-28.956,18.026 -28.134,18.026 -28.007,18.153 -27.867,18.293 Q11.2@-27.867,19.571
NetR4_2: R4.2 U1.10 | length 1.9
  Top Layer w0.254: R4.2@-71.563,16.809 -71.236,16.482 U1.10@-69.82,16.482
NetR22_2: R22.2 U3.10 | length 5.2
  Bottom Layer w0.254: R22.2@-27.24,1.156 -26.942,0.858 -23.549,0.858 -23.291,1.116 U3.10@-23.291,2.109
NetR61_1: R61.1 TP52.1 U11.B2 | length 75.2
  Top Layer w0.152: v1(-16.564,21.857) -15.77,22.651 11.344,22.651 13.294,20.701 v1(13.335,20.701)
  Top Layer w0.178: U11.B2@-41.383,20.438 -41.383,20.847 -41.154,21.076
  Top Layer w0.254: -41.154,21.076 -40.138,21.076 TP52.1@-39.751,21.463 -38.862,22.352 -24.003,22.352 v1@-23.794,22.143
  Power w0.152: v1(-23.749,22.098) -23.749,21.082 -22.974,20.307 -18.113,20.307 v1(-16.564,21.857)
  Bottom Layer w0.254: R61.1@6.596,9.316 7.059,9.779 10.728,9.779 13.281,12.332 v1@13.281,20.714
NetU6_31: U6.31 U7.1 | length 1
  Bottom Layer w0.203: U7.1@-11.442,14.783 U6.31@-10.472,14.783
NetU6_32: U6.32 U7.2 | length 0.9
  Bottom Layer w0.203: U7.2@-11.41,15.183 U6.32@-10.472,15.183
NTC: R24.2 R26.1 RTH1.1 U3.11 U3.12 Us1.2 | length 66
  Top Layer w0.254: v1(-27.232,3.823) -26.089,4.966 -26.089,8.332 -26.699,8.941 -26.699,11.163 v1(-26.724,11.189)
  Power w0.254: v1(-59.69,18.288) -59.69,7.899 -55.74,3.95 -35.827,3.95 -34.73,2.853 -27.567,2.853 -27.232,3.188 v1(-27.232,3.823)
  Bottom Layer w0.254: Us1.2@-61.351,18.047 -62.03,18.726 -60.128,18.726 v1(-59.69,18.288) ; v1@-27.24,3.815 RTH1.1@-27.24,3.061 -27.24,2.18 -26.502,1.442 -24.565,1.442 ; v1(-26.724,11.189) -25.514,11.189 R24.2@-25.019,10.694 ; U3.12@-24.291,2.109 -24.291,1.716 -24.565,1.442 ; U3.11@-23.791,2.109 -23.791,1.581 -23.93,1.442 -24.565,1.442
ON/OFF: Q8.4 Q8.5 R39.1 TP71.1 U6.28 | length 71.6
  Top Layer w0.203: TP71.1@-64.57,1.41 -63.554,1.41 v1(-62.792,0.648)
  Power w0.203: v1(-52.578,8.763) -45.606,8.763 -45.085,8.242 -42.304,8.242 v1(-42.037,8.509)
  Ground w0.152: v1(-42.037,8.509) -41.415,7.887 -35.491,7.887 -34.094,9.284 -18.275,9.284 -17.78,9.779 v1(-17.78,10.414)
  Bottom Layer w0.152: v1(-17.78,10.414) -17.78,9.906 -17.374,9.5 -12.212,9.5 -11.684,10.028 -11.684,12.835 -10.936,13.583 U6.28@-10.472,13.583
  Bottom Layer w0.203: v1(-62.792,0.648) -60.125,0.648 -59.109,1.664 -59.109,3.569 -58.182,4.496 -52.848,4.496 -52.546,4.798 Q8.5@-52.546,5.901 Q8.4@-52.546,11.651 ; -52.538,9.927 R39.1@-51.108,9.927
OTG: Q3.3 R23.1 TP28.1 U3.8 | length 12
  Top Layer w0.254: TP28.1@-16.51,2.159 -15.929,2.74 v1(-15.929,3.95)
  Bottom Layer w0.203: U3.8@-22.291,2.109 -22.291,1.296 -21.802,0.807 -16.818,0.807 -16.691,0.934 Q3.3@-16.691,2.89 -15.929,3.652 v1(-15.929,3.95)
PLUG_DETECT: R62.1 TP72.1 U6.14 | length 60.7
  Top Layer w0.152: v1(-35.941,1.651) -34.333,1.651 TP72.1@-33.74,2.244
  Power w0.152: v1(-48.441,2.172) -48.2,2.413 -36.703,2.413 v1(-35.941,1.651) -35.67,1.38 -5.986,1.38 -5.156,2.21 -5.156,4.944 -2.213,7.887 v1(-2.213,8.554)
  Bottom Layer w0.152: U6.14@-5.647,11.558 -5.647,10.941 -5.292,10.586 -4.098,10.586 -2.213,8.701 v1(-2.213,8.554)
  Bottom Layer w0.203: R62.1@-49.338,2.807 -48.695,2.807 -48.441,2.553 v1(-48.441,2.172)
PMID: C20.1 C46.1 C47.1 Q9.4 Q9.8 TP34.1 U3.23 | length 18.7
  Top Layer w0.762: v1@-21.517,16.71 TP34.1@-21.517,17.666
  Bottom Layer w0.254: Q9.8@-25.05,20.589 -25.05,21.305 -24.892,21.463 ; -24.384,21.463 -24.223,21.302 Q9.4@-24.223,20.589 -23.74,20.589 ; U3.23@-22.291,6.109 -22.291,7.461 C20.1@-22.098,7.654
  Bottom Layer w0.508: -23.74,20.589 -23.256,20.589 -22.747,20.08 -22.403,20.08
  Bottom Layer w0.762: -24.892,21.463 -24.384,21.463 ; C20.1@-22.098,7.654 C46.1@-22.098,9.178
  Bottom Layer w1.27: C46.1@-22.098,9.178 C47.1@-22.098,10.702 -22.098,11.43
  Bottom Layer w2.032: -22.098,11.43 -22.098,15.367 -22.098,17.272 -22.098,19.304
  other v1: -22.398,12.102 -21.89,12.102 -21.382,12.102 -22.398,12.737 -21.89,12.737 -21.382,12.737 -22.398,13.372 -21.89,13.372 -21.382,13.372 -21.844,14.097 -21.336,14.097 -22.398,14.134 -21.844,14.732 -21.336,14.732 -22.398,14.769 -21.971,15.367 -21.336,15.367 -22.652,15.404 -22.606,16.002 -21.971,16.002 -21.336,16.002 -22.606,16.637 -21.59,16.637 -22.606,17.272 -22.606,17.907 -22.606,18.542 -22.098,18.542 -21.59,18.542
REGN: C21.1 R24.1 U3.22 | length 4.8
  Bottom Layer w0.254: R24.1@-25.019,9.694 -24.542,9.694 C21.1@-23.736,8.887 -22.914,8.066 -22.914,7.103 -22.791,6.98 U3.22@-22.791,6.109
STAT_INT: R20.2 TP26.1 U3.4 U6.19 | length 25.1
  Top Layer w0.152: TP26.1@-7.293,9.411 -7.293,8.776 -7.071,8.554 v1(-6.023,8.554)
  Power w0.152: v1(-19.993,3.855) -18.145,5.702 -15.194,5.702 -15.093,5.601 -9.103,5.601 -6.15,8.554 v1(-6.023,8.554)
  Bottom Layer w0.152: U3.4@-21.114,3.859 U3.4@-21.041,3.859 v1@-19.997,3.859 ; U6.19@-7.647,11.558 -7.647,10.107 -5.205,7.665 R20.2@-4.11,7.665
SWCLK: J5.3 U6.24 | length 26.6
  Top Layer w0.152: v1(-10.287,11.094) -3.46,11.094 -1.637,9.271 v1(-1.016,9.271) ; v1(-2.159,5.842) -2.108,5.893 -1.092,5.893 -0.762,6.223 v1(-0.762,6.35)
  Bottom Layer w0.152: v1(-10.287,11.094) -10.128,10.935 -9.768,10.935 -9.647,11.056 U6.24@-9.647,11.558 ; v1(-2.159,5.842) -2.159,6.322 -1.6,6.881 -1.6,9.068 -1.397,9.271 v1(-1.016,9.271) ; v1@-1.171,9.144 v1@-1.016,9.144 ; v1(-0.762,6.35) -0.61,6.502 6.883,6.502 J5.3@8.001,7.62 J5.3@8.001,7.592
SWDIO: J5.2 R27.2 U4.1 U6.23 | length 28.5
  Top Layer w0.152: v1(-10.287,10.332) -10.112,10.332 -9.706,10.738 -3.607,10.738 -1.378,8.509 v1(-1.016,8.509) ; J5.2@8.009,6.274 J5.2@8.009,6.395
  Bottom Layer w0.152: v1(-10.287,10.332) -9.858,10.332 -9.247,10.943 U6.23@-9.247,11.558 ; v1(-1.016,8.509) -1.016,6.962 -1.321,6.657 -1.321,6.119 -0.993,5.791 -0.333,5.791 0.023,6.147 6.223,6.147 ; U4.1@3.74,4.125 5.149,4.125 R27.2@6.223,5.199 6.223,6.147 ; J5.2@8.001,6.35 7.798,6.147 6.223,6.147
SWITCH_KEY: J7.9 R51.2 TP69.1 U6.42 | length 38.3
  Top Layer w0.152: J7.9@-29.78,9.325 -29.78,9.72 -29.467,10.033 -28.6,10.033 -28.346,10.287 -28.346,11.524 R51.2@-27.813,12.057 ; R51.2@-27.805,12.065 R51.2@-27.813,12.057 ; TP69.1@-17.453,21 v1(-17.453,22.143) -19.304,22.143 -20.797,20.65 -22.53,20.65 -23.19,19.99 -23.19,16.18 -23.622,15.748 -26.797,15.748 -27.813,14.732 R51.2@-27.813,12.057
  Bottom Layer w0.152: v1(-17.453,22.143) -16.939,22.657 -8.315,22.657 -7.623,21.965 -7.623,21.133 -7.647,21.109 U6.42@-7.647,17.608 U6.42@-7.66,17.621
SYS: C13.1 C15.1 C16.1 F1.2 L4.2 R23.2 TP25.1 U3.15 U3.16 | length 42.5
  Top Layer w0.762: TP25.1@-37.592,2.244 -37.321,2.515 -35.948,2.515 v1(-34.725,3.737)
  Power w0.381: -19.557,2.98 -15.943,2.98 v1@-15.113,3.81
  Power w0.508: v1(-26.724,7.379) -25.581,7.379 -24.565,6.363 -21.39,6.363 -20.882,5.855 -20.882,3.615 -20.247,2.98 -19.557,2.98
  Bottom Layer w0.254: -26.851,4.458 -26.252,3.859 U3.15@-25.041,3.859 ; -26.724,4.839 -26.244,4.359 U3.16@-25.041,4.359
  Bottom Layer w0.381: R23.2@-15.683,1.442 -15.113,2.012 v1@-15.113,3.81
  Bottom Layer w0.762: F1.2@-37.87,2.54 -37.87,3.786 -36.936,4.72 ; C16.1@-35.995,4.72 -36.936,4.72 ; v1(-34.725,3.737) C13.1@-34.725,4.836 ; C13.1@-34.725,4.902 C13.1@-34.725,4.836 ; L4.2@-29.444,4.902 C15.1@-33.201,4.902 -33.268,4.836 C13.1@-34.725,4.836 ; L4.2@-29.391,4.85 -26.735,4.85 ; v1@-26.735,7.368 -26.735,4.85 ; -26.724,4.839 -26.735,4.85 ; -36.936,4.72 -36.82,4.836 C13.1@-34.725,4.836
  other v1: -15.113,3.937
SYS_VCC: C11.1 F1.1 TP15.1 U2.1 U2.8 U2.10 U2.12 | length 20.8
  Top Layer w0.508: v1(-42.345,5.093) -42.345,1.197 -42.037,0.889 TP15.1@-41.021,0.889
  Bottom Layer w0.254: U2.1@-44.971,4.097 -45.754,4.097 -45.901,3.95 -45.901,3.188 -45.647,2.934 -42.091,2.934 -41.837,3.188 -41.837,4.826 -41.837,5.728 -42.206,6.097 U2.8@-43.021,6.097 ; U2.12@-43.021,4.097 -41.857,4.097 ; U2.10@-43.021,5.097 -41.841,5.097
  Bottom Layer w0.762: -41.837,4.826 -40.957,4.826 C11.1@-40.894,4.763 -40.87,4.738 F1.1@-40.87,2.54
UART_RX: J6.2 U6.44 | length 20.8
  Top Layer w0.152: v1(-6.658,21.508) -5.972,22.194 8.667,22.194 9.017,21.844 J6.2@9.017,21.082
  Bottom Layer w0.152: U6.44@-6.847,17.608 -6.847,21.319 v1(-6.658,21.508)
UART_TX: J6.1 U6.43 | length 23.3
  Bottom Layer w0.152: U6.43@-7.247,17.608 -7.247,20.873 -7.242,20.878 -7.242,21.968 -6.559,22.651 9.607,22.651 10.287,21.971 J6.1@10.287,21.082
VCC-: J4.4 Q7.1 Q8.1 Q8.8 R63.2 TP43.1 | length 36
  Top Layer w0.508: v1(-57.023,2.667) -56.782,2.908 -51.435,2.908 -49.559,4.785 -49.559,9.369 -47.03,11.898 J4.4@-47.03,13.477 -47.03,14.946 -44.831,17.145 TP43.1@-44.831,17.272 ; -55.68,2.981 v1(-55.68,5.08)
  Bottom Layer w0.508: v1@-57.069,2.688 R63.2@-55.68,2.688 -55.68,2.045 -55.49,1.854 Q7.1@-54.258,1.854 ; v1(-55.68,5.08) -54.791,5.08 -54.496,5.375 Q8.8@-54.496,5.901 Q8.1@-54.496,11.651
pads on no net: J2.13 J2.14 J7.13 J7.14 LS1.3 LS1.4 U1.4 U1.9 U1.11 U2.6 U6.2 U6.26

## Polygon pours and split planes (outlines as drawn)
PMID on Bottom Solder "Bottom Layer-No Net" (solid): -22.987,20.193 -21.082,20.193 -21.082,11.43 -23.114,11.43 -23.114,20.193
GND on Top Solder "Bottom Layer-No Net" (solid): -25.654,5.842 -20.574,5.842 -20.574,3.175 -17.399,3.175 -17.399,0.254 -25.654,0.254
ADAPTER on Top Solder "Bottom Layer-No Net" (solid): -26.035,13.589 -23.749,13.589 -23.749,11.176 -21.336,8.763 -21.209,8.636 -15.875,8.636 -15.875,6.477 -15.748,6.35 -15.875,6.477 -22.225,6.477 -22.479,6.477 -25.908,9.906 -26.035,10.033 -26.035,13.589
BAT on Top Solder "Bottom Layer-No Net" (solid): -69.85,22.352 -59.055,22.352 cw(c-59.055,19.812) -56.515,19.812 -56.515,19.685 -56.515,16.51 -58.928,16.51 -58.928,18.923 -59.548,19.543 ccw(c-60.198,18.892) -60.198,19.812 -69.85,19.812
GND on Ground "Bottom Layer-No Net" (solid, remove dead copper, pour order 20): -72.517,23.114 12.827,23.114 13.843,22.098 13.97,21.971 13.97,11.43 13.97,9.271 6.858,2.159 6.985,2.286 6.985,14.859 -0.381,14.859 -0.127,14.605 -0.127,3.683 -1.651,3.683 -1.651,0 -63.754,0 -65.405,0 -66.802,0 -76.327,9.525 -75.946,9.906 -75.946,19.304 -75.946,19.812 -72.517,23.241
AGND on Ground "Bottom Layer-No Net" (solid, remove dead copper, pour order 17): -0.254,14.224 6.604,14.224 6.604,2.032 5.969,1.397 4.572,0 -1.27,0 -1.27,3.429 0.127,3.429 0.127,14.224
GND on Top Layer "Bottom Layer-No Net" (solid, remove dead copper, pour order 14): -19.177,21.717 -2.032,21.717 -2.032,11.049 -2.286,10.795 -20.701,10.795 -20.701,21.717
GND on Top Layer "Bottom Layer-No Net" (solid, remove dead copper, pour order 19): -41.656,7.62 -1.905,7.62 -1.778,7.493 -2.286,6.985 -2.286,0 -41.783,0
AGND on Top Layer "Bottom Layer-No Net" (solid, remove dead copper, pour order 15): -0.381,11.43 6.35,11.43 6.35,1.778 6.477,1.651 5.207,0.381 2.921,0.381 -0.127,0.381 -0.508,0
BATTERY on Power "Bottom Layer-No Net" (solid, remove dead copper, pour order 13): -75.946,19.431 -72.517,22.86 -62.611,22.86 -62.484,22.733 -62.484,18.796 -62.484,18.415 -65.659,15.24 -66.421,14.478 -66.421,11.049 -69.596,11.049 -69.596,13.335 -76.03,13.335
CHARGE_O on Power "Bottom Layer-No Net" (solid, remove dead copper, pour order 16): -50.8,21.082 -27.432,21.082 -27.432,20.955 -24.13,17.653 -24.638,17.145 -24.638,13.462 -39.624,13.462 -42.799,16.637 -44.069,17.907 -50.8,17.907
BAT on Power "Bottom Layer-No Net" (solid, remove dead copper, pour order 18): -59.436,16.637 -44.704,16.637 -39.243,11.176 -35.941,7.874 -35.56,7.874 -26.924,7.874 -25.146,6.096 -24.765,5.715 -24.765,3.556 -32.893,3.556 -33.147,3.302 -34.29,4.445 -36.703,4.445 -40.513,4.445 -42.672,6.604 -42.799,6.731 -46.482,6.731 -59.436,6.731 -59.563,6.604
GND on Bottom Layer "Bottom Layer-No Net" (solid, remove dead copper, pour order 35): -13.589,17.653 -12.319,17.653 -12.319,16.383 -12.192,16.256 -11.176,16.256 -11.176,15.607 -11.152,15.583 -11.24,15.494 -13.589,15.494
GND on Bottom Layer "Bottom Layer-No Net" (solid, remove dead copper, pour order 22): -2.286,4.699 -0.254,4.699 -0.254,1.905 -0.127,1.778 0,1.651 1.524,1.651 1.524,0.254 1.397,0.381 -2.286,0.381

## Keep-outs
Keep-Out Layer:
  circle w0.127: c-71.03,12 r1.1
  circle w0.127: c8.97,12 r1.1
  lines w0.127: -70.545,3.515 ccw(c-62.06,12) -62.06,0 0,0 ccw(c0,12) 8.485,3.515 11.627,6.657 ccw(c5.97,12.313) 13.97,12.313 13.97,21 ccw(c11.97,21) 11.97,23 -20.512,23 ccw(c-20.521,22.491) -21.03,22.5 -21.03,21.5 cw(c-21.53,21.5) -21.53,21 -22.53,21 cw(c-22.53,21.5) -23.03,21.5 -23.03,22.5 ; -70.545,3.515 -73.687,6.657 cw(c-68.03,12.314) -76.03,12.314 -76.03,19.177 cw(c-75.313,19.177) -75.82,19.684 -72.765,22.739 cw(c-72.136,22.111) -72.136,23 -23.53,23 cw(c-23.539,22.491) -23.03,22.482

## Other copper
Ground:
  pour cut-out: -12.827,15.621 -10.033,15.621 -10.033,14.224 -12.827,14.224

## Silkscreen, mask and mechanical layers (free items; w line width, h text height)
Top Overlay:
  circle w0.102: c-41.953,19.254 r0.152
  lines w0.152: -42.156,19.685 -40.886,19.685 -40.886,20.905 -42.156,20.905 -42.156,19.685
  text "11AMBERMB10E-20160203-P5" at -16.383,20.32 h0.64
  text "ClearGrass" at -16.383,19.685 h0.64
  text "M5" at -13.081,19.685 h0.64
Bottom Overlay:
  drawing of 617 lines, arcs and shapes, not listed
  text "2#" at -13.451,17.793 h0.64

## Text inside footprints (layer, text, board x,y; h text height)
Us1: Bottom Overlay "VCC" at -52.886,13.068 h0.64; Bottom Overlay "NTC" at -60.506,13.1 h0.64; Bottom Overlay "GND" at -67.11,12.981 h0.64